# EAGLE board Beunboard_rev1temp (EAGLE 9.5.2)
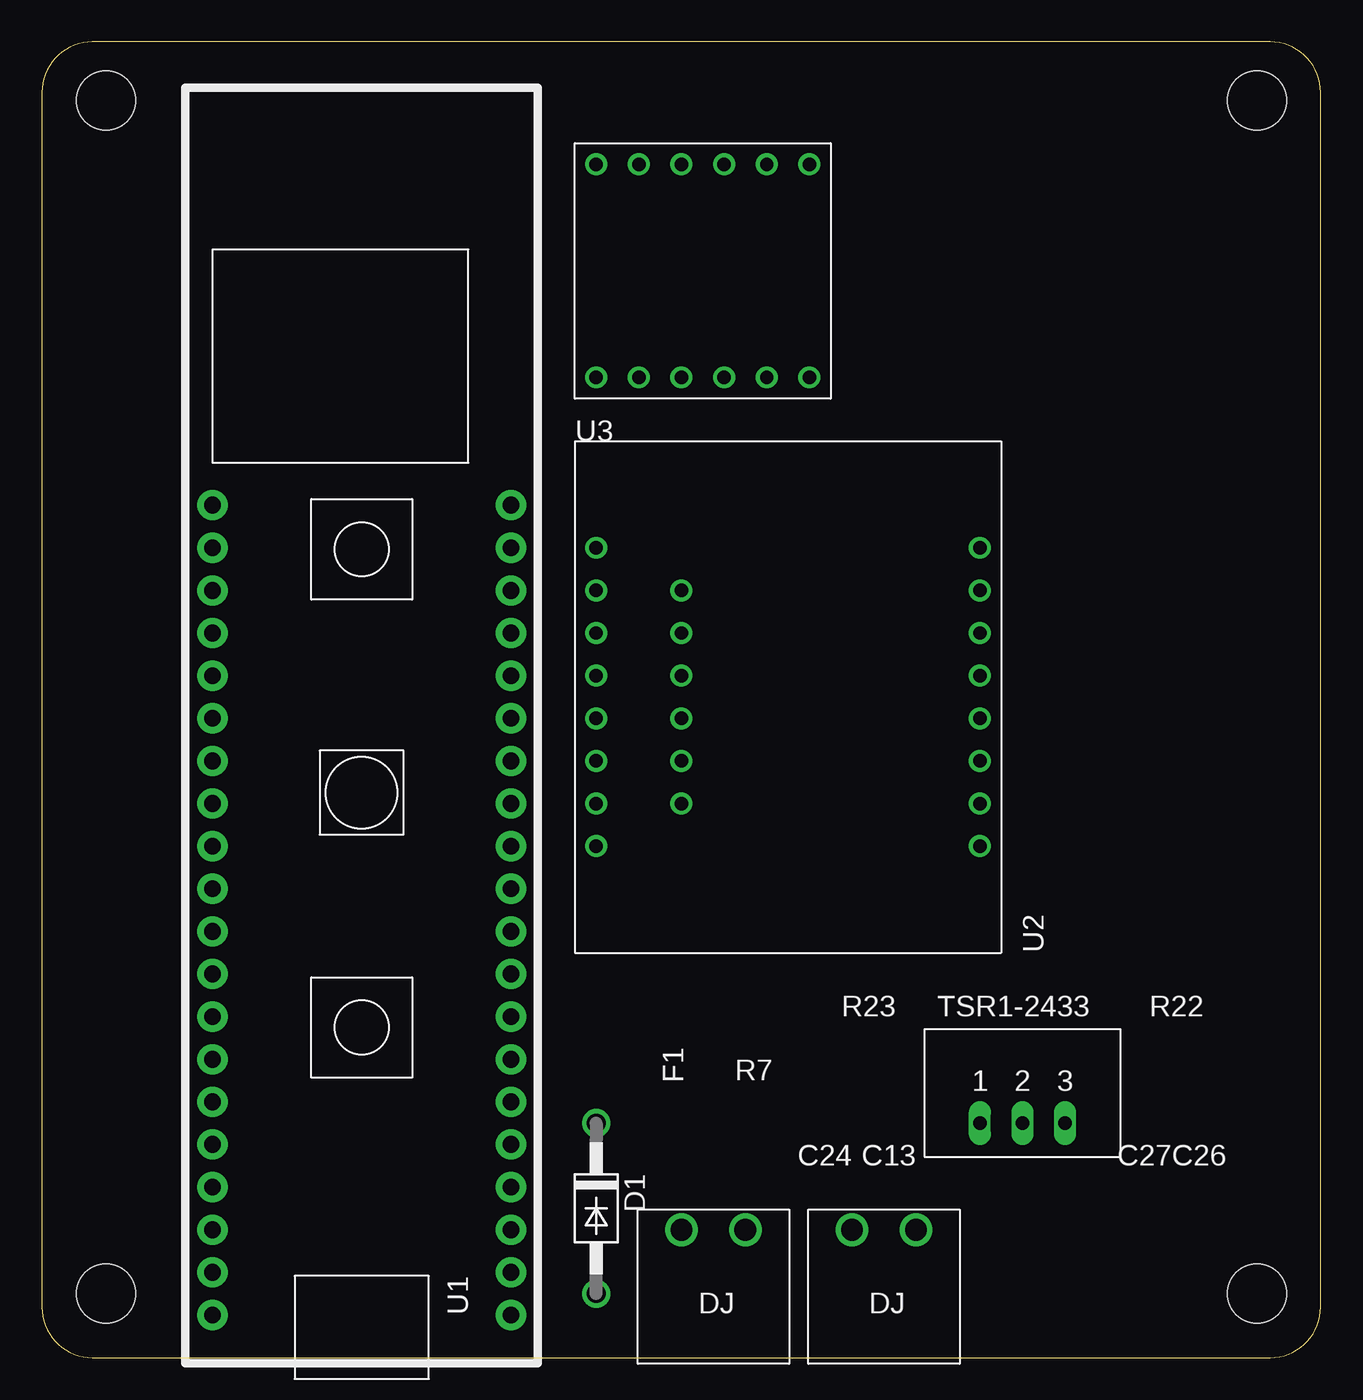
[diagram p0: board, top side]
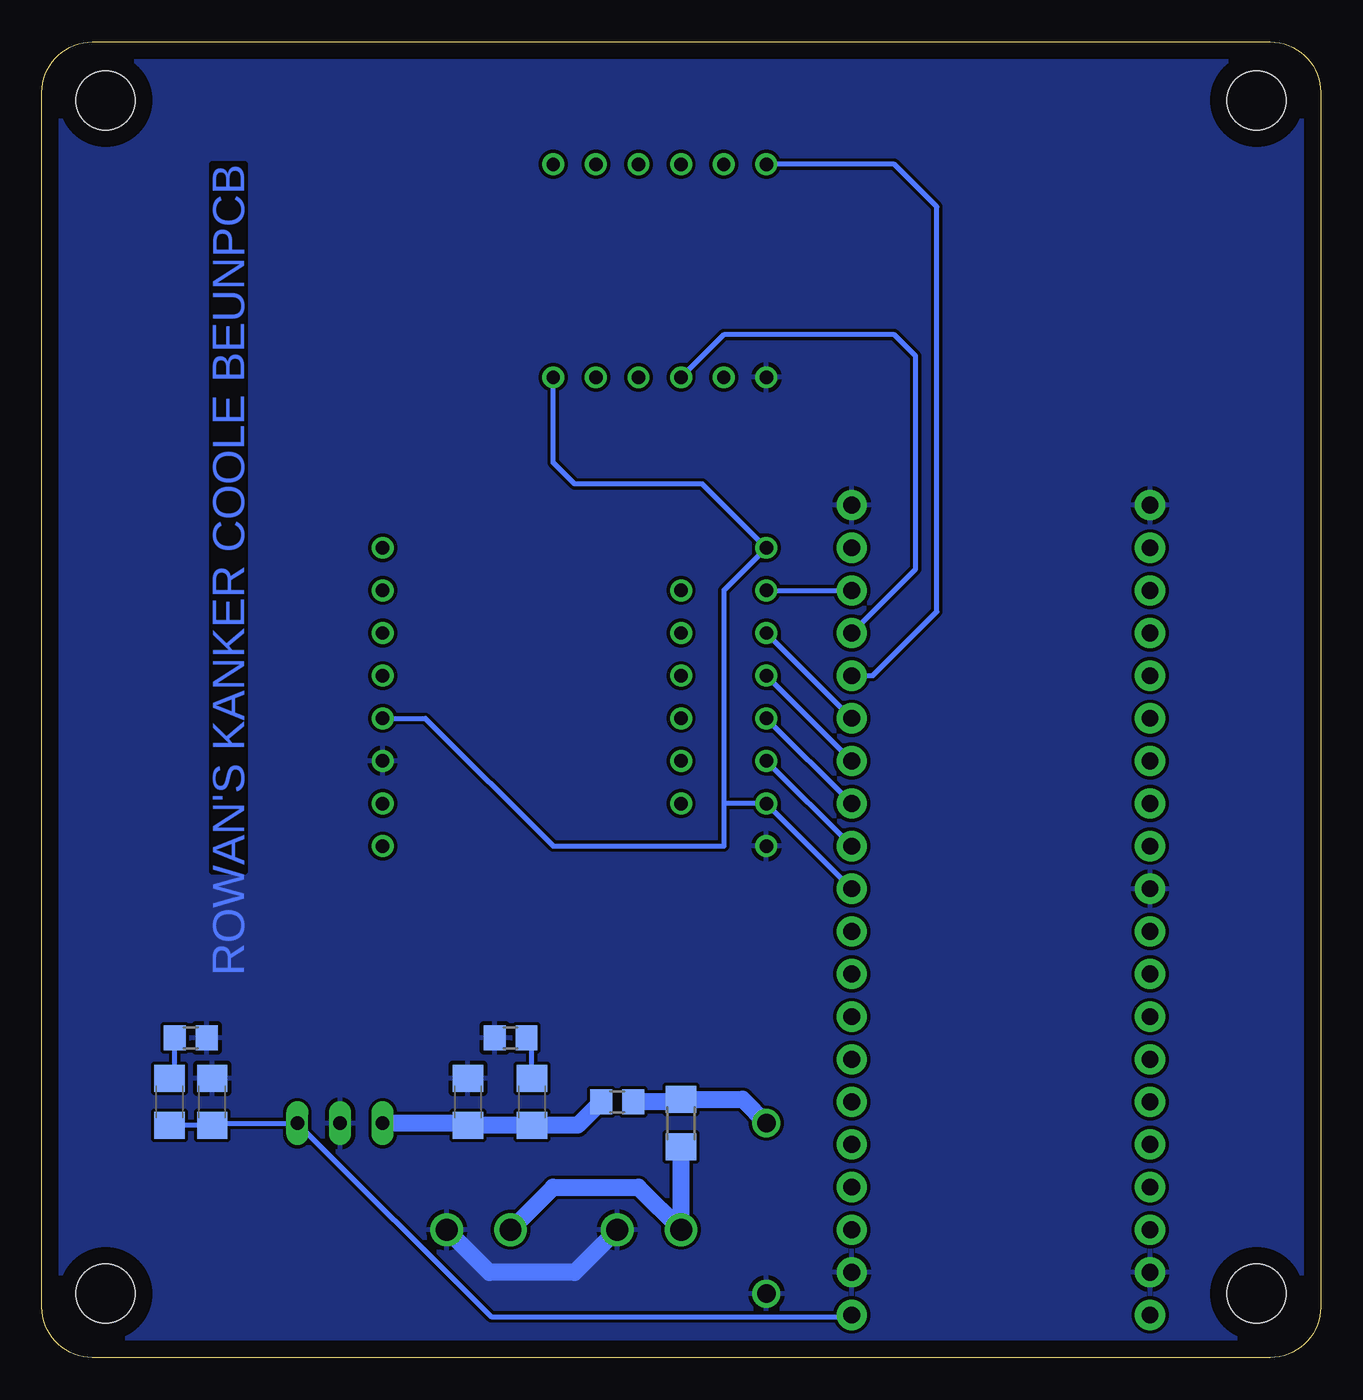
[diagram p1: board, bottom side, seen from below]

Size 76.18 x 78.41 mm. Coordinates in mm from the lower left corner, seen from the top.
Outline: 0,75.41 0,3 arc90 3,0 73.18,0 arc90 76.18,3 76.18,75.41 arc90 73.18,78.41 3,78.41 arc90 0,75.41
Copper layers (1*16): Top 0.035mm / dielectric 1.5mm / Bottom 0.035mm
Design rules "default": minimum track width 6mil, minimum drill 0.35mm, track to track 6mil, track to pad 6mil, pad to pad 6mil, via to via 6mil, smd to smd 6mil, copper to edge 40mil, drill to drill 6mil, minimum pad ring 10mil, minimum via ring 8mil, stop-mask expansion 4mil, vias tented up to drill 0mil, thermal gap 10mil
Net classes: 0 default: width 0.2 mm, drill 0.3 mm, clearance 0.2 mm; 1 3V3: width 0.5 mm, drill 0.3 mm, clearance 0.2 mm to class 0; 3 24v: width 1 mm, drill 0.5 mm, clearance 0.2 mm to class 0; 4 VCC: width 1 mm, clearance 0.2 mm to class 0
Holes 3.5 mm at 3.81,74.93 72.39,74.93 72.39,3.81 3.81,3.81

## Footprints (pad centres in the part's own frame; a part is rotated, then mirrored left to right if it is on the bottom)
C1206 = smd 1.6 x 1.8: 1 -1.4,0; 2 1.4,0
DO41-10 = drill 1.118: A 5.08,0; C -5.08,0
R1206 = smd 1.6 x 1.803: 1 -1.422,0; 2 1.422,0
CON_3.81MM2_SIDE = drill 1.3: P$1 0,0; P$2 3.81,0
R0805 = smd 1.3 x 1.5: 1 -0.95,0; 2 0.95,0
TSR1-2433 = drill 0.8 long: GND 0,0; VI -2.54,0; VO 2.54,0
XMEGABOARD-REV1.00-20150419 = drill 1 pad 1.8: P$01 8.89,-24.13; P$02 8.89,-21.59; P$03 8.89,-19.05; P$04 8.89,-16.51; P$05 8.89,-13.97; P$06 8.89,-11.43; P$07 8.89,-8.89; P$08 8.89,-6.35; P$09 8.89,-3.81; P$10 8.89,-1.27; P$11 8.89,1.27; P$12 8.89,3.81; P$13 8.89,6.35; P$14 8.89,8.89; P$15 8.89,11.43; P$16 8.89,13.97; P$17 8.89,16.51; P$18 8.89,19.05; P$19 8.89,21.59; P$20 8.89,24.13; P$21 -8.89,24.13; P$22 -8.89,21.59; P$23 -8.89,19.05; P$24 -8.89,16.51; P$25 -8.89,13.97; P$26 -8.89,11.43; P$27 -8.89,8.89; P$28 -8.89,6.35; P$29 -8.89,3.81; P$30 -8.89,1.27; P$31 -8.89,-1.27; P$32 -8.89,-3.81; P$33 -8.89,-6.35; P$34 -8.89,-8.89; P$35 -8.89,-11.43; P$36 -8.89,-13.97; P$37 -8.89,-16.51; P$38 -8.89,-19.05; P$39 -8.89,-21.59; P$40 -8.89,-24.13
SPARKFUN_BNO080 = drill 0.8: P$1 -8.89,11.43; P$2 -6.35,11.43; P$3 -3.81,11.43; P$4 -1.27,11.43; P$5 1.27,11.43; P$6 3.81,11.43; P$7 6.35,11.43; P$8 8.89,11.43; P$9 -6.35,6.35; P$10 -3.81,6.35; P$11 -1.27,6.35; P$12 1.27,6.35; P$13 3.81,6.35; P$14 6.35,6.35; P$15 -8.89,-11.43; P$16 -6.35,-11.43; P$17 -3.81,-11.43; P$18 -1.27,-11.43; P$19 1.27,-11.43; P$20 3.81,-11.43; P$21 6.35,-11.43; P$22 8.89,-11.43
NAVSPARK_MINI = drill 0.8: P$1 -6.35,6.35; P$2 -3.81,6.35; P$3 -1.27,6.35; P$4 1.27,6.35; P$5 3.81,6.35; P$6 6.35,6.35; P$7 -6.35,-6.35; P$8 -3.81,-6.35; P$9 -1.27,-6.35; P$10 1.27,-6.35; P$11 3.81,-6.35; P$12 6.35,-6.35

## Placement (x,y rotation side)
C13  10uF  [C1206]  50.8,15.24 90 bottom
C24  22uF  [C1206]  46.99,15.24 90 bottom
C26  22uF  [C1206]  68.58,15.24 90 bottom
C27  10uF  [C1206]  66.04,15.24 90 bottom
D1  1N4004  [DO41-10]  33.02,8.89 270 top
F1  350mA  [R1206]  38.1,13.97 90 bottom
POWER1  CON_3.81MM2_SIDE  [CON_3.81MM2_SIDE]  48.26,7.62 0 top
POWER2  CON_3.81MM2_SIDE  [CON_3.81MM2_SIDE]  38.1,7.62 0 top
R7  0.2 Ohm  [R0805]  41.91,15.24 0 bottom
R22  1 Ohm  [R0805]  67.31,19.05 0 bottom
R23  1 Ohm  [R0805]  48.26,19.05 0 bottom
TSR1-2433  [TSR1-2433]  58.42,13.97 0 top
U1  XMEGABOARD-REV1.00-20150419DIP  [XMEGABOARD-REV1.00-20150419]  19.05,26.67 0 top
U2  SPARKFUN_BNO080SPARKFUN_BNO080  [SPARKFUN_BNO080]  44.45,39.37 90 top
U3  NAVSPARK_MININAVSPARK_MINI  [NAVSPARK_MINI]  39.37,64.77 0 top

## Library data of the parts
C13 C24 C26 C27 = rcl; SPICEPREFIX: C
D1 = diode
F1 = adafruit
POWER1 POWER2 = Phoenix-con
R7 R22 R23 = rcl; SPICEPREFIX: R
TSR1-2433 = tracopower
U1 = HVA-IC
U2 = SPARKFUN_BNO080
U3 = NAVSPARK_MINI

## Nets
+3V3: U1.P$11 U2.P$2 U2.P$8 U2.P$18 U3.P$12
+5V: C26.1 C27.1 TSR1-2433.VO U1.P$01
+24V [24v]: C13.1 C24.1 R7.1 TSR1-2433.VI
CS: U1.P$15 U2.P$6
GND: C13.2 C27.2 D1.A POWER1.P$2 POWER2.P$2 R22.2 R23.1 TSR1-2433.GND U1.P$02 U1.P$20 U1.P$21 U1.P$30 U1.P$39 U2.P$1 U2.P$17 U3.P$7
GPS_TO_XMEGA: U1.P$17 U3.P$9
MISO: U1.P$13 U2.P$4
MOSI: U1.P$14 U2.P$5
N$2: C26.2 R22.1
N$25: C24.2 R23.2
N$37: D1.C F1.2 R7.2
SPI_CLK: U1.P$12 U2.P$3
VCC [VCC]: F1.1 POWER1.P$1 POWER2.P$1
WAKE: U1.P$18 U2.P$7
XMEGA_TO_GPS: U1.P$16 U3.P$1

## Tracks (layer width: path | path; a pad name or v marks a point on that pad's centre or on a via)
+3V3
  Bottom 0.3: U1.P$11 U2.P$2 35.56,33.02 | U3.P$12 45.72,53.34 44.45,52.07 36.83,52.07 U2.P$8 35.56,45.72 35.56,33.02 | U2.P$18 53.34,38.1 45.72,30.48 35.56,30.48 35.56,33.02
+5V
  Bottom 0.3: C26.1 C27.1 65.91,13.97 TSR1-2433.VO 49.43,2.44 28.04,2.44 U1.P$01
+24V
  Bottom 1: R7.1 44.26,13.84 C24.1 C13.1 50.93,13.97 TSR1-2433.VI
CS
  Bottom 0.3: U1.P$15 U2.P$6
GND
  Bottom 1: POWER2.P$2 44.45,5.08 49.53,5.08 POWER1.P$2
  pour Bottom: 0,78.74 0,0 76.2,0 76.2,78.74
GPS_TO_XMEGA
  Bottom 0.3: U1.P$17 24.13,46.99 24.13,59.69 25.4,60.96 35.56,60.96 U3.P$9
MISO
  Bottom 0.3: U1.P$13 U2.P$4
MOSI
  Bottom 0.3: U1.P$14 U2.P$5
N$2
  Bottom 0.3: C26.2 68.26,16.96 R22.1
N$25
  Bottom 0.3: C24.2 46.99,18.73 R23.2
N$37
  Bottom 1: D1.C 34.44,15.39 F1.2 38.25,15.24 R7.2
SPI_CLK
  Bottom 0.3: U1.P$12 U2.P$3
VCC
  Bottom 1: POWER1.P$1 45.72,10.16 40.64,10.16 POWER2.P$1 F1.1
WAKE
  Bottom 0.3: U2.P$7 U1.P$18
XMEGA_TO_GPS
  Bottom 0.3: U1.P$16 26.67,40.64 22.86,44.45 22.86,68.58 25.4,71.12 U3.P$1

## Text on the board
Bottom: ROWAN'S KANKER COOLE BEUNPCB